# EAGLE board aduinobasic - копия (EAGLE 6.3)
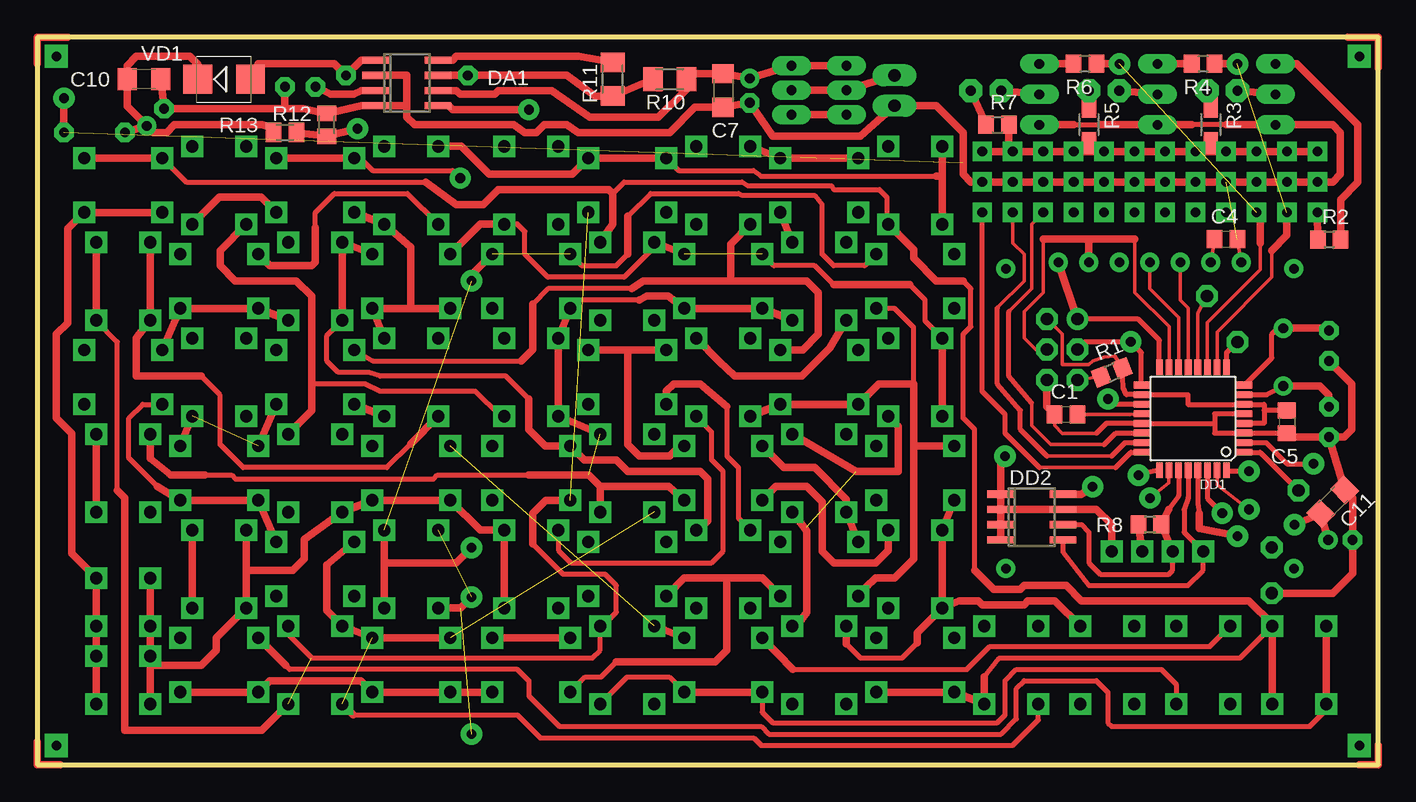
[diagram p0: board, top side]
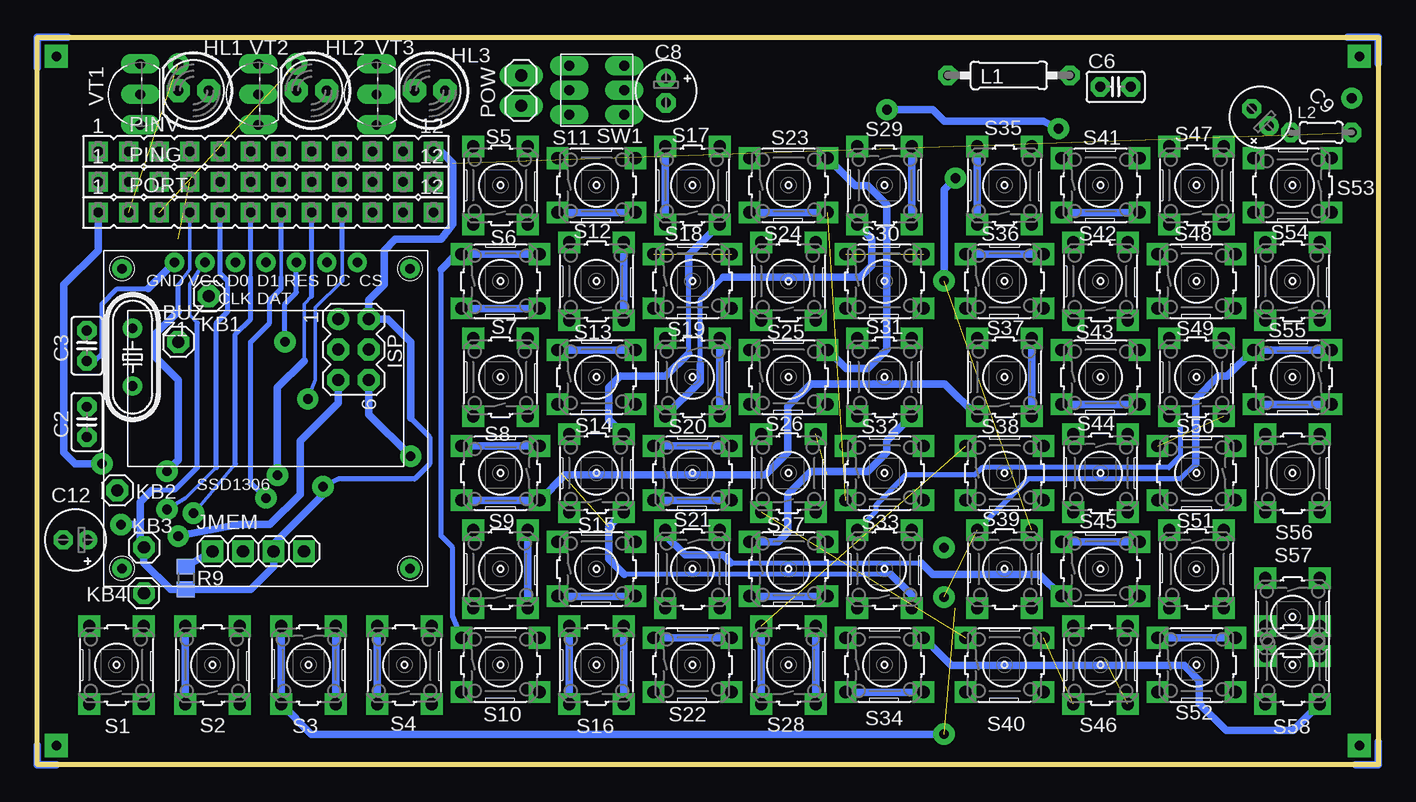
[diagram p1: board, bottom side, seen from below]

Size 111.76 x 60.64 mm. Coordinates in mm from the lower left corner, seen from the top.
Outline: 111.76,60.64 0,60.64 0,0 111.76,0 111.76,60.64
Copper layers (1*16): Top 0.035mm / dielectric 1.5mm / Bottom 0.035mm
Design rules "ArduinoBASIC": minimum track width 10mil, minimum drill 24mil, track to track 8mil, track to pad 8mil, pad to pad 8mil, via to via 8mil, smd to smd 8mil, copper to edge 40mil, drill to drill 7mil, minimum pad ring 0.4mm, minimum via ring 8mil, stop-mask expansion 4mil, vias tented up to drill 0mil, thermal gap 10mil

## Footprints (pad centres in the part's own frame; a part is rotated, then mirrored left to right if it is on the bottom)
1X01 = drill 1.016 octagon: 1 0,0
C0805 = smd 1.3 x 1.5: 1 -0.95,0; 2 0.95,0
C025-025X050 = drill 0.813 octagon: 1 -1.27,0; 2 1.27,0
C1206 = smd 1.6 x 1.8: 1 -1.4,0; 2 1.4,0
RCL_E2-5 = drill 0.813 pad 1.27: + -1.016,0 | drill 0.813 pad 1.27 octagon: - 1.016,0
SOIC8 = smd 0.6 x 2.2: 1 -1.905,-2.6; 2 -0.635,-2.6; 3 0.635,-2.6; 4 1.905,-2.6; 5 1.905,2.6; 6 0.635,2.6; 7 -0.635,2.6; 8 -1.905,2.6
TQFP32-08 = smd 1.27 x 0.559: 1 -4.293,2.8; 2 -4.293,2; 3 -4.293,1.2; 4 -4.293,0.4; 5 -4.293,-0.4; 6 -4.293,-1.2; 7 -4.293,-2; 8 -4.293,-2.8; 17 4.293,-2.8; 18 4.293,-2; 19 4.293,-1.2; 20 4.293,-0.4; 21 4.293,0.4; 22 4.293,1.2; 23 4.293,2; 24 4.293,2.8 | smd 0.559 x 1.27: 9 -2.8,-4.293; 10 -2,-4.293; 11 -1.2,-4.293; 12 -0.4,-4.293; 13 0.4,-4.293; 14 1.2,-4.293; 15 2,-4.293; 16 2.8,-4.293; 25 2.8,4.293; 26 2,4.293; 27 1.2,4.293; 28 0.4,4.293; 29 -0.4,4.293; 30 -1.2,4.293; 31 -2,4.293; 32 -2.8,4.293
SO-08 = smd 0.6 x 2.2: 1 -1.905,-2.6; 2 -0.635,-2.6; 3 0.635,-2.6; 4 1.905,-2.6; 5 1.905,2.6; 6 0.635,2.6; 7 -0.635,2.6; 8 -1.905,2.6
SSD1306_0.96 = drill 0.8: CS 7.62,10.12; D1/DAT 0,10.12; DC 5.08,10.12; DO/CLK -2.54,10.12; GND -7.62,10.12; P$1 -12,9.6; P$2 12,9.6; P$3 12,-15.4; P$4 -12,-15.4; RES 2.54,10.12; VCC -5.08,10.12
LED5MM = drill 0.813 pad 1.93 octagon: A -1.27,0; K 1.27,0
MA03-2 = drill 1.016: 1 -2.54,-1.27 | drill 1.016 octagon: 2 -2.54,1.27; 3 0,-1.27; 4 0,1.27; 5 2.54,-1.27; 6 2.54,1.27
1X04 = drill 1.016 square: 1 -3.81,0; 2 -1.27,0; 3 1.27,0; 4 3.81,0
0207/10 = drill 0.813 octagon: 1 -5.08,0; 2 5.08,0
0204/5 = drill 0.813 octagon: 1 -2.54,0; 2 2.54,0
FE12 = drill 0.813 square: 1 -13.97,0; 2 -11.43,0; 3 -8.89,0; 4 -6.35,0; 5 -3.81,0; 6 -1.27,0; 7 1.27,0; 8 3.81,0; 9 6.35,0; 10 8.89,0; 11 11.43,0; 12 13.97,0
1X02 = drill 1.016 long: 1 -1.27,0; 2 1.27,0
R0805 = smd 1.3 x 1.5: 1 -0.95,0; 2 0.95,0
R1206W = smd 1.8 x 1.2: 1 -1.499,0; 2 1.499,0
M1206 = smd 1.6 x 2: 1 -1.4,0; 2 1.4,0
M0805 = smd 1.3 x 1.6: 1 -0.95,0; 2 0.95,0
B3F-10XX = drill 1.016 square: 1 -3.251,2.261; 2 3.251,2.261; 3 -3.251,-2.261; 4 3.251,-2.261
9077-2 = drill 0.813 long: 1 -2.04,2.29; 2 0,2.29; 3 2.04,2.29; 4 -2.04,-2.29; 5 0,-2.29; 6 2.04,-2.29
SMB = smd 2.4 x 2.4: A 2.2,0; C -2.2,0
TO92-ECB = drill 0.813 long: B 2.54,0; C 0,0; E -2.54,0
HC49/S = drill 0.813: 1 -2.413,0; 2 2.413,0

## Placement (x,y rotation side)
BUZ  [1X01]  100.01,35.24 0 bottom
C1  100n  [C0805]  85.72,29.21 0 top
C2  1n  [C025-025X050]  107.63,28.57 90 bottom
C3  1n  [C025-025X050]  107.63,34.93 90 bottom
C4  100n  [C0805]  99.06,43.82 0 top
C5  100n  [C0805]  104.14,28.57 270 top
C6  1n  [C025-025X050]  21.91,56.52 0 bottom
C7  100n  [C1206]  57.15,56.2 270 top
C8  47µ/16V  [RCL_E2-5]  59.37,56.2 270 bottom
C9  100µ 16V  [RCL_E2-5]  9.84,53.98 135 bottom
C10  100n  [C1206]  8.89,57.15 180 top
C11  100n  [C1206]  107.95,21.91 225 top
C12  100µ 16V  [RCL_E2-5]  108.58,18.73 180 bottom
DA1  MC34063AD  [SOIC8]  30.8,56.83 270 top
DD1  ATMEGA328  [TQFP32-08]  96.31,28.84 180 top
DD2  24LC256SN  [SO-08]  82.87,20.64 270 top
DISPLAY  SSD1306  [SSD1306_0.96]  92.71,31.75 0 bottom
HL1  [LED5MM]  98.74,56.2 180 bottom
HL2  [LED5MM]  88.9,56.2 180 bottom
HL3  [LED5MM]  79.06,56.2 180 bottom
ISP  [MA03-2]  85.41,34.61 270 bottom
JMEM  [1X04]  93.34,17.78 0 bottom
KB1  [1X01]  97.47,39.05 0 bottom
KB2  [1X01]  105.09,22.86 0 bottom
KB3  [1X01]  102.87,18.1 0 bottom
KB4  [1X01]  102.87,14.29 180 bottom
L1  100uh  [0207/10]  30.8,57.47 0 bottom
L2  [0204/5]  4.76,52.71 0 bottom
PING  [FE12]  92.71,48.58 0 bottom
PINV  [FE12]  92.71,51.12 0 bottom
PORT  [FE12]  92.71,46.04 0 bottom
POW  [1X02]  71.44,56.2 270 bottom
R1  10k  [R0805]  89.53,32.7 22 top
R2  1k  [R0805]  107.67,43.79 0 top
R3  10k  [R1206W]  97.79,53.34 270 top
R4  10k  [R0805]  97.16,58.42 180 top
R5  10k  [R1206W]  87.63,53.34 270 top
R6  10k  [R0805]  87.31,58.42 180 top
R7  10k  [R0805]  80.01,53.34 0 top
R8  10k  [R0805]  92.71,20 180 top
R9  10k  [R0805]  99.38,15.56 270 bottom
R10  1  [M1206]  52.7,57.15 180 top
R11  200  [M1206]  47.94,57.15 270 top
R12  1k  [M0805]  24.13,53.34 270 top
R13  3k  [M0805]  20.64,52.71 180 top
S1  LSH  [B3F-10XX]  105.16,8.3 90 bottom
S2  Space  [B3F-10XX]  97.16,8.3 90 bottom
S3  ~  [B3F-10XX]  89.16,8.3 270 bottom
S4  [  [B3F-10XX]  81.16,8.3 90 bottom
S5  Y  [B3F-10XX]  73.16,48.3 90 bottom
S6  K  [B3F-10XX]  73.16,40.3 0 bottom
S7  V  [B3F-10XX]  73.16,32.3 90 bottom
S8  A  [B3F-10XX]  73.16,24.3 180 bottom
S9  Q  [B3F-10XX]  73.16,16.3 90 bottom
S10  ]  [B3F-10XX]  73.16,8.3 0 bottom
S11  W  [B3F-10XX]  65.16,48.3 0 bottom
S12  E  [B3F-10XX]  65.16,40.3 90 bottom
S13  S  [B3F-10XX]  65.16,32.3 0 bottom
S14  M  [B3F-10XX]  65.16,24.3 90 bottom
S15  J  [B3F-10XX]  65.16,16.3 0 bottom
S16  Z  [B3F-10XX]  65.16,8.3 90 bottom
S17  X  [B3F-10XX]  57.16,48.3 90 bottom
S18  R  [B3F-10XX]  57.16,40.3 0 bottom
S19  D  [B3F-10XX]  57.16,32.3 270 bottom
S20  U  [B3F-10XX]  57.16,24.3 0 bottom
S21  B  [B3F-10XX]  57.16,16.3 270 bottom
S22  Space  [B3F-10XX]  57.16,8.3 0 bottom
S23  H  [B3F-10XX]  49.16,48.3 0 bottom
S24  T  [B3F-10XX]  49.16,40.3 90 bottom
S25  N  [B3F-10XX]  49.16,32.3 0 bottom
S26  P  [B3F-10XX]  49.16,24.3 90 bottom
S27  L  [B3F-10XX]  49.16,16.3 0 bottom
S28  Space  [B3F-10XX]  49.16,8.3 90 bottom
S29  F  [B3F-10XX]  41.16,48.3 270 bottom
S30  Ii  [B3F-10XX]  41.16,40.3 0 bottom
S31  O  [B3F-10XX]  41.16,32.3 270 bottom
S32  G  [B3F-10XX]  41.16,24.3 0 bottom
S33  C  [B3F-10XX]  41.16,16.3 90 bottom
S34  \|  [B3F-10XX]  41.16,8.3 0 bottom
S35  7  [B3F-10XX]  31.16,48.3 90 bottom
S36  4  [B3F-10XX]  31.16,40.3 0 bottom
S37  1  [B3F-10XX]  31.16,32.3 90 bottom
S38  ,<  [B3F-10XX]  31.16,24.3 0 bottom
S39  =+  [B3F-10XX]  31.16,16.3 270 bottom
S40  ;:  [B3F-10XX]  31.16,8.3 0 bottom
S41  8  [B3F-10XX]  23.16,48.3 0 bottom
S42  5  [B3F-10XX]  23.16,40.3 90 bottom
S43  2  [B3F-10XX]  23.16,32.3 0 bottom
S44  .>  [B3F-10XX]  23.16,24.3 270 bottom
S45  /?  [B3F-10XX]  23.16,16.3 0 bottom
S46  " '  [B3F-10XX]  23.16,8.3 90 bottom
S47  9  [B3F-10XX]  15.16,48.3 90 bottom
S48  6  [B3F-10XX]  15.16,40.3 0 bottom
S49  3  [B3F-10XX]  15.16,32.3 90 bottom
S50  0  [B3F-10XX]  15.16,24.3 180 bottom
S51  *  [B3F-10XX]  15.16,16.3 270 bottom
S52  RSH  [B3F-10XX]  15.16,8.3 0 bottom
S53  Backspace  [B3F-10XX]  7.16,48.3 180 bottom
S54  Esc  [B3F-10XX]  7.16,40.3 90 bottom
S55  -_  [B3F-10XX]  7.16,32.3 180 bottom
S56  +  [B3F-10XX]  7.16,24.3 270 bottom
S57  Enter  [B3F-10XX]  7.16,12.3 270 bottom
S58  Enter  [B3F-10XX]  7.16,8.3 270 bottom
SW1  POW  [9077-2]  65.14,56.23 270 bottom
VD1  SS12  [SMB]  15.56,57.15 0 top
VT1  КТ315Б  [TO92-ECB]  103.19,55.88 90 bottom
VT2  КТ315Б  [TO92-ECB]  93.34,55.88 90 bottom
VT3  КТ315Б  [TO92-ECB]  83.5,55.88 90 bottom
Z1  16Mhz  [HC49/S]  103.82,33.97 270 bottom

## Library data of the parts
BUZ KB1-KB4 POW = pinhead
C1-C6 C10 C11 L1 L2 R1-R13 = rcl
C7 = rc-elektronik
C8 C9 C12 = HWProgUSB
DA1 = mc34063
DD1 = atmel; MPN: ATMEGA8-16AU; OC_FARNELL: 9171371; OC_NEWARK: 73M8863
DD2 = microchip; MF: MICROCHIP; MPN: 24LC256-I/SN; OC_FARNELL: 9757996; OC_NEWARK: 27C9144
DISPLAY HL1-HL3 JMEM SW1 = ArduinoBASIC
ISP = con-lstb
PING PINV PORT = ArduinoBASIC; OC_FARNELL: unknown; OC_NEWARK: unknown
S1-S58 = ArduinoBASIC; MPN: B3F-1000; OC_FARNELL: 176432; OC_NEWARK: 36M3542
VD1 = diode
VT1-VT3 = transistor
Z1 = crystal; OC_FARNELL: 1667008; OC_NEWARK: unknown

## Nets
A0: DD1.23 PORT.11
A1: DD1.24 PORT.12
A2: DD1.25 PORT.8
A3: DD1.26 PORT.7
A6: DD1.19 PORT.9
A7: DD1.22 PORT.10
AREF: C1.2 DD1.20
BUZ: BUZ.1 DD1.9
CLK: DD1.13 DISPLAY.DO/CLK
D0: DD1.30 PORT.6
D1: DD1.31 PORT.5
D2: DD1.32 PORT.4
D3: S34.1 S34.2 S53.1 S53.2 S57.1 S57.2 S58.1 S58.2
D4: DD1.2 PORT.1 R2.1
D6: DD1.10 PORT.2 R4.1
D7: DD1.11 PORT.3 R6.1
D12: S3.1 S3.2 S8.1 S8.2 S9.1 S9.2 S16.1 S16.2 S37.1 S54.1 S54.2
D13: S11.1 S11.2 S13.1 S13.2 S17.1 S17.2 S43.1
D14: S12.1 S19.1 S19.2 S33.2 S49.1
D15: S7.1 S7.2 S18.1 S18.2 S21.1 S24.2 S29.1 S29.2 S32.1 S36.1 S36.2 S42.1 S42.2
D16: S5.1 S5.2 S14.1 S15.1 S20.1 S20.2 S23.1 S23.2 S25.1 S25.2 S35.1 S35.2 S48.1
D17: S6.1 S6.2 S10.1 S30.1 S30.2 S39.1 S39.2 S41.1 S41.2
D18: S27.1 S31.2 S44.1 S47.1
D19: S4.1 S4.2 S26.1 S40.1 S40.2 S45.1 S45.2 S46.1 S46.2 S50.1 S50.2 S55.1 S55.2
D23: S2.1 S2.2 S22.1 S22.2 S28.1 S28.2 S38.1
D24: S51.1 S51.2
D25: S56.1 S56.2
D26: S1.1 S1.2 S52.1 S52.2
DATA: DD1.14 DISPLAY.D1/DAT
GND: C1.1 C2.1 C3.1 C4.2 C5.2 C6.2 C7.2 C8.- C9.- C10.1 C11.1 C12.- DA1.2 DA1.4 DD1.3 DD1.5 DD1.21 DD2.1 DD2.2 DD2.3 DD2.4 DD2.7 DISPLAY.GND ISP.6 JMEM.4 KB4.1 PING.1 PING.2 PING.3 PING.4 PING.5 PING.6 PING.7 PING.8 PING.9 PING.10 PING.11 PING.12 POW.2 R12.1 VT1.E VT2.E VT3.E
KBDAT: DD1.12 KB1.1
KBIRQ: DD1.1 KB2.1
MISO: DD1.16 DISPLAY.CS ISP.1
MOSI: DD1.15 DISPLAY.DC ISP.4
N$1: C2.2 DD1.7 Z1.2
N$2: C3.2 DD1.8 Z1.1
N$3: C7.1 C8.+ DA1.6 R10.1 SW1.1 SW1.4
N$4: POW.1 SW1.2 SW1.5
N$5: DA1.8 R11.1
N$6: DA1.7 L1.1 R10.2 R11.2
N$7: DA1.5 R12.2 R13.1
N$8: DA1.1 L1.2 VD1.A
N$9: C6.1 DA1.3
N$10: SW1.3 SW1.6
N$11: HL1.K VT1.C
N$12: R2.2 VT1.B
N$13: HL1.A R3.1
N$14: HL2.K VT2.C
N$15: R4.2 VT2.B
N$16: HL2.A R5.1
N$17: HL3.K VT3.C
N$18: R6.2 VT3.B
N$19: HL3.A R7.1
N$21: C9.+ C10.2 L2.1 R13.2 VD1.C
RESET: DD1.29 ISP.5 R1.1
SCK: DD1.17 DISPLAY.RES ISP.3
SCL: DD1.28 DD2.5 JMEM.1 R9.1
SDA: DD1.27 DD2.6 JMEM.2 R8.1
U4: S35.3 S36.3 S36.4 S37.3 S37.4 S41.3 S41.4 S43.3 S43.4 S47.3 S49.3 S50.3 S50.4
U5: S3.3 S3.4 S39.3 S39.4 S42.3 S48.3 S48.4 S55.3 S55.4
U6: S21.3 S25.3 S45.3
U7: S7.3 S14.3 S14.4 S16.3 S16.4 S17.3 S33.3 S33.4 S38.3 S38.4 S44.4 S51.3 S51.4 S57.3 S57.4 S58.3 S58.4
U8: S2.3 S22.3 S22.4 S23.3 S23.4 S28.3 S28.4 S32.3 S46.3 S46.4 S54.3 S54.4
U9: S6.3 S6.4 S8.3 S8.4 S13.3 S13.4 S15.3 S15.4 S19.4 S27.3 S27.4 S29.4 S34.3 S34.4 S40.3 S40.4 S52.3 S52.4
U10: S1.3 S1.4 S4.3 S5.3 S10.3 S10.4 S24.4 S53.3 S53.4
U11: S9.3 S9.4 S11.3 S11.4 S12.3 S12.4 S18.3 S18.4 S20.3 S20.4 S26.3 S26.4 S30.3 S31.3 S31.4 S56.3
VCC: C4.1 C5.1 C11.2 C12.+ DD1.4 DD1.6 DD1.18 DD2.8 DISPLAY.VCC ISP.2 JMEM.3 KB3.1 L2.2 PINV.1 PINV.2 PINV.3 PINV.4 PINV.5 PINV.6 PINV.7 PINV.8 PINV.9 PINV.10 PINV.11 PINV.12 R1.2 R3.2 R5.2 R7.2 R8.2 R9.2

## Tracks (layer width: path | path; a pad name or v marks a point on that pad's centre or on a via)
A0
  Top 0.305: 80.01,38.1 82.23,40.32 82.23,42.55 81.28,43.5 PORT.11 | 84.14,25.72 89.53,25.72
  Top 0.406: 89.53,25.72 90.66,26.84 DD1.23 | 84.14,25.72 81.91,27.94 81.91,29.53 80.01,31.75 80.01,38.1
A1
  Top 0.305: 83.5,24.76 89.85,24.76 | 91.69,26.04 DD1.24
  Top 0.406: 89.85,24.76 91.12,26.04 91.69,26.04 | 83.5,24.76 80.64,27.62 80.64,29.21 78.74,31.11 PORT.12
A2  (via drill 0.8 pad 1.78)
  Top 0.406: DD1.25 v91.76,24.13
  Bottom 0.305: 89.53,33.66 89.53,38.42 88.9,39.05 | 88.9,40.64 88.9,42.86
  Bottom 0.406: 88.9,39.05 88.9,40.64 | 88.9,42.86 PORT.8
  Bottom 0.61: v91.76,24.13 91.76,31.43 89.53,33.66
A3  (via drill 0.8 pad 1.78)
  Top 0.305: DD1.26 94.3,23.9 94.3,23.49 v92.71,22.22
  Bottom 0.305: 91.44,40.64 91.44,42.86
  Bottom 0.406: v92.71,22.22 93.98,23.49 93.98,35.24 92.39,36.83 92.39,38.73 91.44,39.69 91.44,40.64 | 91.44,42.86 PORT.7
A6  (via drill 0.8 pad 1.78)
  Top 0.406: DD1.19 89.97,30.04 v89.22,30.48
  Bottom 0.305: v89.22,30.48 88.58,32.07 88.58,38.1 86.36,40.32 | 86.36,40.64 86.36,42.86
  Bottom 0.406: 86.36,40.32 86.36,40.64 | 86.36,42.86 PORT.9
A7
  Top 0.305: 80.96,37.78 82.87,39.69 82.87,45.09 PORT.10 | 88.9,26.67 84.45,26.67 82.87,28.26 82.87,30.16
  Top 0.406: 88.9,26.67 89.87,27.64 DD1.22 | 82.87,30.16 80.96,32.39 80.96,37.78
AREF
  Top 0.305: DD1.20 91.06,29.21 C1.2
BUZ
  Top 0.406: DD1.9 99.11,34.34 BUZ.1
CLK
  Top 0.305: DD1.13 95.91,38.08 95.25,38.73 DISPLAY.DO/CLK
D0  (via drill 0.8 pad 1.78)
  Top 0.406: DD1.30 97.51,22.19 v98.74,20.95
  Bottom 0.305: v98.74,20.95 95.25,25.08 | 93.98,40.64 93.98,42.86
  Bottom 0.406: 95.25,25.08 95.25,35.88 93.98,37.15 93.98,40.64 | 93.98,42.86 PORT.6
D1  (via drill 0.8 pad 1.78)
  Top 0.305: DD1.31 98.31,23.29 v100.96,21.27
  Bottom 0.305: v100.96,21.27 99.38,22.22 96.84,24.76
  Bottom 0.406: 96.84,24.76 96.84,36.83 95.88,37.78 95.88,40.32 96.52,40.96 PORT.5
D2  (via drill 0.8 pad 1.78)
  Top 0.406: v100.96,24.45 99.21,24.45 DD1.32
  Bottom 0.305: 100.01,40.01 99.06,41.27 PORT.4
  Bottom 0.406: 100.01,37.78 100.01,40.01
  Bottom 0.61: v100.96,24.45 100.01,25.4 100.01,32.07 101.92,33.97 101.92,35.88 100.01,37.78
D3
  Top 0.61: S58.1 S57.1 | S57.1 S58.2 S57.2 | S53.1 | S34.1 S34.2 | S53.2 S53.1 | S53.1 2.54,44.67 2.54,36.83 1.59,35.88 1.59,28.89 2.86,27.62 2.86,17.59 S57.1
  Bottom 0.61: S34.2 35.6,8.26 16.19,8.26 14.92,6.99 14.92,5.08 12.7,2.86 7.09,2.86 S58.2
D4  (via drill 0.8 pad 1.78)
  Top 0.406: DD1.2 102.38,26.84 104.14,25.08 v106.36,25.08
  Top 0.61: PORT.1 R2.1
  Bottom 0.61: PORT.1 106.68,42.86 109.54,40.01 109.54,26.04 108.58,25.08 v106.36,25.08
D6  (via drill 0.8 pad 1.78)  (1 unrouted)
  Top 0.305: DD1.10 98.31,36.08 102.87,40.64 102.87,42.86
  Top 0.61: 102.87,42.86 104.14,44.13 PORT.2 | R4.1 v100.01,58.42
D7  (via drill 0.8 pad 1.78)  (1 unrouted)
  Top 0.305: DD1.11 97.51,36.87 101.92,41.27 101.92,43.5
  Top 0.61: 101.92,43.5 101.92,45.72 PORT.3 | R6.1 v90.17,58.42
D12
  Top 0.406: 31.11,26.74 29.14,24.76 17.14,24.76 15.24,26.67 15.24,30.8 13.65,32.39 | 67.42,10.05 68.58,8.89 72.07,8.89 73.34,10.16
  Top 0.61: S9.2 S9.1 | S54.2 S54.1 8.25,35.57 8.25,32.39 13.65,32.39 | 31.11,26.74 S37.1 | S9.2 75.38,19.55 | S8.2 S9.2 | S9.1 76.83,13.65 78.42,13.65 78.74,13.34 82.23,13.34 82.55,13.65 84.8,13.65 S3.1 | S16.2 67.42,10.05 | 73.34,10.16 73.34,10.97 S9.1
  Bottom 0.61: S3.2 S3.1 | S8.2 S8.1 67.82,24.13 51.12,24.13 49.21,26.04 49.21,29.84 47.31,31.75 36.12,31.75 S37.1 | S16.1 S16.2
D13
  Top 0.406: 49.53,39.69 42.55,39.69 41.28,38.42 | S43.1 27.94,33.66 40.32,33.66
  Top 0.61: S17.2 S11.2 S11.1 | S13.2 63.77,34.56 65.09,35.88 65.09,39.37 64.13,40.32 57.78,40.32 | S17.1 57.78,43.41 57.78,40.32 | 57.78,40.32 50.48,40.32 49.53,39.69 | 40.32,33.66 41.28,34.61 41.28,38.42
  Bottom 0.61: S17.1 S17.2 | S13.1 S13.2
D14
  Top 0.406: S33.2 43.42,17.86 44.45,16.83 56.2,16.83 57.15,17.78 57.15,24.45 56.2,25.4 56.2,27.75 S19.2
  Top 0.61: S12.1 66.04,34.72 63.71,32.39 58.1,32.39 56.83,33.62 S19.1
  Bottom 0.406: S49.1 16.51,28.14 16.51,25.72 17.46,24.76 33.02,24.76 33.66,24.13 39.37,24.13 41.91,21.59 41.91,21.06 S33.2
  Bottom 0.61: S19.2 S19.1
D15  (1 unrouted)
  Top 0.406: S7.2 73.98,36.99 73.98,38.73 72.71,40.01 | 66.36,40.01 64.77,41.59 61.38,41.59 S18.1 | S24.2 51.42,43.17 48.89,40.64 42.55,40.64 40.64,42.55 40.64,44.45 40,45.09 39.97,45.05 S29.2 | 40.96,30.48 39.05,32.39 28.57,32.39 27.62,32.7 25.08,32.7 24.13,33.66 24.13,35.76 S42.1
  Top 0.61: S42.1 S42.2 S36.2 | S36.1 36.9,45.05 S29.2 | S24.2 S18.2 | S7.1 S7.2 | S21.1 55.11,19.55 55.88,20.32 55.88,23.81 55.24,24.45 49.21,24.45 48.26,25.4 45.57,25.4 S32.1 42.34,26.56 40.96,27.94 40.96,30.48 | 72.71,40.01 66.36,40.01
  Bottom 0.61: S36.1 S36.2 | S29.1 S29.2
D16
  Top 0.406: 23.18,44.77 23.18,46.04 24.76,47.62 30.84,47.62 S35.1 | S23.1 53.44,49.53 59.69,49.53 60.33,49.05 74.93,49.05
  Top 0.61: S15.1 S14.1 67.42,22.11 64.77,24.76 62.21,24.76 S20.1 | S23.1 S23.2 44.56,49.21 37.66,49.21 35.33,51.55 S35.2 | S48.1 19.38,41.59 22.86,41.59 23.18,41.91 23.18,44.77 | S20.2 53.55,26.56 52.7,25.72 50.16,25.72 49.21,26.67 49.21,34.56 | S5.2 75.42,49.05 | 75.42,49.05 S5.1 | 74.93,49.05 75.42,49.05 | S25.2 49.21,34.56 | 49.21,34.56 S25.1
  Bottom 0.61: S35.1 S35.2 | S20.1 S20.2 | S25.2 44.37,33.02 42.55,33.02 40.96,34.61 40.96,46.67 42.55,48.26 43.61,48.26 S23.2
D17  (via drill 0.8 pad 1.78)  (2 unrouted)
  Top 0.406: S41.1 26.91,50.56 27.94,49.53 34.61,49.53 v35.24,48.9 | 49.21,45.72 51.12,47.62 58.42,47.62 58.74,47.47 64.77,47.47 65.41,46.67 65.41,42.55 66.36,41.59 68.94,41.59 S6.2 | S30.1 45.38,41.59 48.26,41.59 49.21,42.55
  Top 0.61: S41.2 S41.1 | S39.2 28.9,16.83 | 28.9,16.83 S39.1 | v36.19,40.32 36.19,40.85 S30.2 | 49.21,42.55 49.21,45.72 | v36.19,18.1 34.92,16.83 28.9,16.83
  Bottom 0.406: S10.1 77.15,12.38 77.15,18.1 78.1,19.05 78.1,41.27 | 76.43,42.55 S6.1
  Bottom 0.61: S6.1 S6.2 | v35.24,48.9 36.19,47.94 v36.19,40.32 | 76.43,42.55 76.83,42.55 78.1,41.27
D18
  Top 0.406: S31.2 38.58,29.05 36.51,31.11 28.57,31.11 27.3,31.75 22.86,31.75
  Top 0.61: S44.1 22.86,29.51 22.86,31.75 22.86,39.05 21.59,40.32 16.51,40.32 15.24,41.59 15.24,42.87 S47.1
  Bottom 0.61: S27.1 50.02,18.56 49.21,19.37 49.21,22.54 47.31,24.45 42.55,24.45 40.96,26.04 40.96,26.99 S31.2
D19  (2 unrouted)
  Top 0.406: 26.32,4.13 40,4.13 41.91,2.22 59.69,2.22 60.33,1.59 81.28,1.59 83.42,3.73 S4.1 | 10,23.18 7.62,25.56 7.62,28.89 8.77,30.04 S55.2
  Top 0.61: 10,23.18 S50.1 S50.2 S45.2 | S45.1 24.13,16.66 24.13,12.84 S46.2 S40.2 S40.1 | 26.32,4.13 25.42,5.03 S46.1
  Bottom 0.61: S55.2 S55.1 | S45.1 S45.2 | S4.2 S4.1
D23  (1 unrouted)
  Top 0.406: S2.2 97.71,9.84 79.38,9.84 77.47,7.94 62.95,7.94
  Top 0.61: S22.2 S28.2 | S22.1 62.95,7.94
  Bottom 0.61: S22.2 S22.1 | S28.1 S28.2 | S2.2 S2.1
D24
  Top 0.61: S51.2 S51.1
D25
  Top 0.61: S56.2 S56.1
D26
  Top 0.406: S1.1 107.42,4.55 106.05,3.17 89.53,3.17 89.22,3.49 89.22,6.03 88.27,6.99 82.23,6.99 81.6,6.35 81.6,3.81 80.33,2.54 60.96,2.54 60.33,3.17 43.5,3.17 40.96,5.71 40.96,6.99 40,7.94 21.03,7.94 20.72,8.26
  Top 0.61: S1.2 S1.1 | S52.1 20.72,8.26
  Bottom 0.61: S52.2 S52.1
DATA
  Top 0.305: DD1.14 95.11,37.29 92.71,39.69 DISPLAY.D1/DAT
GND  (via drill 0.8 pad 1.78)  (1 unrouted)
  Top 0.305: 88.27,27.62 85.41,27.62 84.77,28.25 C1.1 | DISPLAY.GND C4.2
  Top 0.406: DD1.5 98.11,29.24 98.11,28.44 | 98.11,28.44 98.11,27.64 DD1.3 104.12,27.64 C5.2 | 98.11,28.44 DD1.21 89.08,28.44 88.27,27.62 | 86.36,53.34 88.58,53.34 | 99.06,53.34 96.2,53.34
  Top 0.61: C2.1 108.9,27.3 109.54,27.94 109.54,31.75 C3.1 | C2.1 104.46,27.3 C5.2 | 30.8,54.93 DA1.4 26.99,54.93 R12.1 22.14,54.69 20.64,54.69 | 30.8,54.93 30.8,57.47 DA1.2 | C10.1 C9.- 20.64,54.69 | 20.64,54.69 C6.2 | VT3.E 86.36,53.34 | 88.58,53.34 VT2.E 96.2,53.34 | 99.06,53.34 VT1.E 107.95,53.34 108.58,52.71 108.58,49.21 107.95,48.58 PING.1 PING.2 PING.3 PING.4 PING.5 PING.6 PING.7 PING.8 PING.9 PING.10 PING.11 PING.12 77.79,48.58 77.15,49.21 77.15,52.71 74.93,54.93 POW.2 68.58,52.39 61.28,52.39 C8.- C7.2 54.8,54.8 52.7,52.71 45.08,52.71 44.13,53.34 42.23,53.34 41.59,52.71 40.64,52.71 39.69,53.34 31.43,53.34 30.8,53.98 30.8,54.93 | ISP.6 84.14,29.85 C1.1 | C2.1 C11.1 109.6,22.24 C12.- 109.6,15.94 107.95,14.29 KB4.1 | v80.64,25.72 80.27,25.34 DD2.1 DD2.2 | DD2.2 DD2.3 DD2.4 | DD2.2 DD2.7 88.27,21.27 89.53,20 JMEM.4
  Bottom 0.406: C3.1 107,33.66 106.36,34.29 106.36,38.42 105.09,39.69 102.51,39.69
  Bottom 0.61: 102.51,39.69 DISPLAY.GND | v80.64,25.72 84.14,29.21 ISP.6
KBDAT
  Top 0.305: KB1.1 96.71,37.65 DD1.12
KBIRQ
  Top 0.406: DD1.1 101.91,26.04 KB2.1
MISO
  Top 0.406: DD1.16 93.51,35.4 91.76,37.15 ISP.1
  Top 0.61: ISP.1 DISPLAY.CS
MOSI
  Top 0.305: 83.82,43.82 83.82,39.37 82.23,37.78 82.23,35.56 83.19,34.61 ISP.4 | 91.44,43.82 91.44,39.37 94.31,36.5 DD1.15
  Top 0.61: 91.44,43.82 87.63,43.82 | 87.63,43.82 DISPLAY.DC | 87.63,43.82 83.82,43.82
N$1
  Top 0.406: DD1.7 102.47,30.84 Z1.2
  Top 0.61: Z1.2 106.87,31.56 107.63,30.8 C2.2
N$2
  Top 0.406: DD1.8 102.87,33.91 102.87,35.88 103.38,36.39 Z1.1
  Top 0.61: Z1.1 107.44,36.39 C3.2
N$3
  Top 0.61: SW1.4 SW1.1 C8.+ C7.1 54.87,57.6 R10.1 54.1,56.33 51.75,53.98 46.04,53.98 42.86,56.2 38.42,56.2 38.1,55.88 35.24,55.88 34.92,56.2 DA1.6
N$4
  Top 0.61: SW1.2 SW1.5 POW.1
N$5
  Top 0.61: DA1.8 34.61,58.74 34.92,59.05 45.08,59.05 R11.1
N$6
  Top 0.61: DA1.7 L1.1 44.13,57.47 46.48,55.75 R11.2 R10.2
N$7  (via drill 0.8 pad 1.78)
  Top 0.61: v40.96,54.61 34.61,54.61 34.29,54.93 DA1.5 | R13.1 R12.2 v26.67,53.02
  Bottom 0.61: v40.96,54.61 37.15,54.61 36.19,53.66 27.94,53.66 v26.67,53.02
N$8
  Top 0.61: DA1.1 26.99,58.74 L1.2 24.76,58.42 18.39,58.42 VD1.A
N$9
  Top 0.61: C6.1 24.45,55.88 26.35,55.88 26.99,56.2 DA1.3
N$10
  Top 0.61: SW1.6 SW1.3
N$11
  Top 0.61: VT1.C HL1.K
N$12
  Top 0.61: R2.2 108.61,47.12 110.04,48.55 110.04,53.34 104.94,58.44 103.21,58.44 VT1.B
N$13
  Top 0.61: R3.1 HL1.A
N$14
  Top 0.61: VT2.C HL2.K
N$15
  Top 0.61: R4.2 VT2.B
N$16
  Top 0.61: HL2.A R5.1
N$17
  Top 0.61: VT3.C HL3.K
N$18
  Top 0.61: R6.2 VT3.B
N$19
  Top 0.61: R7.1 HL3.A
N$20
  Bottom 0.61: 111.76,58.1 111.76,60.64 109.22,60.64
N$21
  Top 0.61: R13.2 19.69,53.02 18.73,53.34 11.43,53.34 10.79,52.71 9.68,52.71 C9.+ | VD1.C 13.36,58.4 12.7,59.05 8.25,59.05 7.49,58.29 C10.2 7.49,54.89 C9.+ | L2.1 C9.+
N$22
  Bottom 0.61: 111.76,1.59 111.76,0 110.17,0
N$23
  Bottom 0.61: 0,1.91 0,0 1.91,0
N$24
  Bottom 0.61: 2.54,60.64 0,60.64 0,58.42
N$25
  Top 0.61: 2.54,60.64 0,60.64 0,58.42
N$26
  Top 0.61: 111.76,58.1 111.76,60.64 109.22,60.64
N$27
  Top 0.61: 111.76,1.59 111.76,0 110.17,0
N$28
  Top 0.61: 1.91,0 0,0 0,1.91
N$29  (via drill 0.8 pad 1.93)
  other vias: 110.17,1.59
N$31  (via drill 0.8 pad 1.93)
  other vias: 1.59,1.59
N$33  (via drill 0.8 pad 1.93)
  other vias: 110.17,59.05
N$34  (via drill 0.8 pad 1.93)
  other vias: 1.59,59.05
RESET  (via drill 0.8 pad 1.78)
  Top 0.305: ISP.5 R1.1
  Top 0.406: DD1.29 96.71,21.78 96.84,20.95
  Top 0.61: 96.84,20.95 96.84,19.68 v100.01,19.05
  Bottom 0.61: v100.01,19.05 94.93,20 92.39,20 89.85,22.54 89.85,26.99 86.68,30.16 ISP.5
SCK  (via drill 0.8 pad 1.78)
  Top 0.406: ISP.3 87.31,35.24 v91.12,35.24 92.02,34.35 DD1.17
  Bottom 0.406: v91.12,35.24 91.12,38.42 90.17,39.37 DISPLAY.RES
SCL
  Top 0.406: DD1.28 95.91,22.25 95.57,21.27 95.57,19.37 JMEM.1 97.16,16.19 95.88,14.92 87.63,14.92 85.47,17.72 DD2.5
  Bottom 0.61: R9.1 JMEM.1
SDA
  Top 0.406: DD1.27 95.11,22.4 94.3,21.27 | DD2.6 86.99,20 87.63,19.37 87.63,16.83 88.58,15.88 94.3,15.88 94.61,16.19 JMEM.2
  Top 0.61: JMEM.2 R8.1 94.3,21.27
U4  (1 unrouted)
  Top 0.61: S50.4 S43.4 | S36.3 31.11,38.04 | 31.11,38.04 S36.4 S37.4 | S41.3 S35.3 31.11,43.15 31.11,38.04 | S43.3 S37.3 | S49.3 S50.3 | S47.3 15.16,47.31 18.64,47.31 S41.4
  Bottom 0.61: S37.3 S37.4 | S43.3 S43.4 | S41.3 S41.4
U5  (via drill 0.8 pad 1.78)  (2 unrouted)
  Top 0.61: S42.3 S48.3 S48.4 S55.4 | S39.4 35.27,13.05 v36.19,13.97
  Bottom 0.406: 15.24,25.08 16.51,23.81 29.21,23.81 29.21,23.76 S39.3
  Bottom 0.61: S55.3 S55.4 12.59,32.39 13.34,32.39 15.24,30.48 15.24,25.08 | v36.19,2.54 88.91,2.54 S3.4 S3.3
U6
  Top 0.406: 57.47,29.84 57.47,25.72 58.42,24.76 58.42,20.55 S21.3
  Top 0.61: 57.47,29.84 55.24,31.75 53.02,31.75 52.41,31.14 S25.3
  Bottom 0.406: 53.97,16.83 38.1,16.83
  Bottom 0.61: S21.3 59.42,19.1 57.78,17.46 54.61,17.46 53.97,16.83 | 38.1,16.83 37.15,15.88 28.25,15.88 S45.3
U7  (1 unrouted)
  Top 0.61: S58.4 9.42,8.26 | 9.42,8.26 S57.4 S58.3 S57.3 9.42,15.88 | S51.3 17.42,16.19 | 17.42,16.19 S51.4 14.92,10.55 14.92,9.53 13.65,8.26 9.42,8.26 | S7.3 71.75,28.19 71.75,24.45 68.23,24.45 S14.4 | S33.3 S33.4 36.9,19.55 S38.3 S38.4 S44.4 22.22,18.77 22.22,17.14 21.27,16.19 17.42,16.19 | S14.3 64.13,19.5 64.13,12.7 63.3,11.55 S16.4
  Bottom 0.406: 40.64,15.88 62.86,15.88 | 57.47,34.29 57.47,40.58
  Bottom 0.61: S16.3 S16.4 | S14.3 64.13,19.81 64.13,17.14 62.86,15.88 | 40.64,15.88 38.9,14.13 S33.3 | S14.4 64.13,28.79 64.13,31.43 63.18,32.39 59.37,32.39 57.47,34.29 | 57.47,40.58 57.47,42.48 S17.3
U8  (2 unrouted)
  Top 0.406: S46.4 20.9,10.85 22.86,8.89 46.26,8.89 46.9,9.53 S28.4 47.11,11.55 48.26,12.7 48.26,14.92 47.31,15.88 43.81,15.88 41.28,18.41 | S22.3 60.41,4.36 61.28,3.49 80.01,3.49 80.64,4.13 80.64,6.99 81.6,7.94 93.66,7.94 94.9,6.7 S2.3 | S28.3 49.15,7.3 52.65,7.3 S22.4 | 6.67,22.86 6.67,35.24 4.9,37.01 S54.3
  Top 0.61: S22.3 S22.4 | S54.4 S54.3 | S46.3 18.71,2.86 7.3,2.86 7.3,22.22 6.67,22.86 | S32.3 42.36,22.04 41.28,20.95 41.28,18.41
  Bottom 0.61: S28.3 S28.4 | S23.3 S23.4
U9
  Top 0.406: 48.26,8.57 46.99,7.3 45.67,7.3 S34.3 | 73.02,31.75 73.02,36.45 71.44,38.04 S6.4
  Top 0.61: S34.4 S40.3 S40.4 26.96,6.99 19.36,6.99 S52.3 S52.4 | S15.3 69.05,14.75 69.85,15.56 71.44,15.56 73.02,17.14 73.02,26.56 | 73.02,26.56 73.02,31.75 70.12,31.75 S13.3 S13.4 S19.4 | S27.3 53.93,15.56 57.47,15.56 | 57.47,15.56 60.39,15.56 S15.4 | S8.4 73.02,26.56 | 48.26,8.57 56.52,8.57 57.47,9.53 57.47,15.56
  Bottom 0.406: 56.52,33.34 56.52,38.73 54.61,40.64
  Bottom 0.61: S34.3 S34.4 | S6.4 S6.3 | S15.3 S15.4 | S27.4 S27.3 | S8.3 S8.4 | 54.61,40.64 43.18,40.64 42.23,41.59 42.23,43.86 S29.4 | S19.4 56.52,31.95 56.52,33.34
U10
  Top 0.406: S53.4 12.39,48.58 32.39,48.58 | 47.94,47.62 48.89,48.58 58.74,48.58 59.21,48.26 66.2,48.26 66.36,47.94 70.17,47.94 70.8,47.31 70.8,45.15 S5.3 | 78.9,7.3 80.17,8.89 100.24,8.89 S1.4 | 78.1,16.19 78.1,27.94 77.15,28.89 77.15,35.88 77.79,36.51 77.79,39.69 77.15,40.32
  Top 0.61: S24.4 47.94,45.09 47.94,47.62 47.62,47.94 38.42,47.94 37.15,46.67 34.92,46.67 32.39,48.58 | S10.4 S10.3 S4.3 78.9,7.3 | S53.3 S53.4 | S5.3 73.02,42.92 73.02,42.23 74.93,40.32 77.15,40.32 | 78.1,16.19 79.69,14.61 81.91,14.61 82.23,14.92 85.72,14.92 86.99,13.65 100.96,13.65 102.9,11.72 S1.4 S1.3
U11  (1 unrouted)
  Top 0.406: 13.97,24.13 16.19,24.13 16.51,23.81 33.02,23.81 33.34,24.13 40.96,24.13 | 50.16,38.73 45.11,38.73 S30.3
  Top 0.61: 46.9,23.18 45.95,24.13 40.96,24.13 | 46.9,23.18 S26.3 | S56.3 9.42,25.5 11.11,24.13 13.97,24.13 | S20.4 52.64,23.18 46.9,23.18 | S12.3 S18.3 S18.4 52.58,39.05 50.8,39.05 50.16,38.73 | S9.4 70.9,17.88 69.85,16.83 66.36,16.83 65.41,17.78 65.41,21.91 64.13,23.18 61.55,23.18 S20.3 | S11.4 S12.4 | S30.3 S31.3 S31.4 S26.4
  Bottom 0.61: S20.3 S20.4 | S9.4 S9.3 | S12.4 S12.3 | S11.3 S11.4
VCC  (via drill 0.8 pad 1.78)  (1 unrouted)
  Top 0.305: ISP.2 85.41,35.88 85.41,33.34 87.63,33.34 87.95,33.66 88.9,33.97 89.78,34.04 R1.2 | C4.1 DISPLAY.VCC
  Top 0.406: C5.1 102.23,29.52 | 102.23,29.52 102.23,28.44 DD1.4 | 102.23,29.52 102.23,30.04 DD1.6 95.88,30.04 95.88,30.84 DD1.18 90.76,30.84 90.49,31.43 R1.2
  Top 0.61: PINV.1 PINV.2 PINV.3 PINV.4 | PINV.4 97.47,51.12 | 97.47,51.12 PINV.5 PINV.6 PINV.7 PINV.8 87.63,51.12 | 87.63,51.12 PINV.9 PINV.10 PINV.11 80.96,51.12 | 80.96,51.12 PINV.12 | R8.2 JMEM.3 | L2.2 v2.22,55.56 | 99.38,51.12 PINV.4 | R7.2 80.96,51.12 | R3.2 97.47,51.12 | R5.2 87.63,51.12 | C12.+ C11.2 v104.77,20 | DD2.8 86.99,22.54 v87.95,23.18
  Bottom 0.305: DISPLAY.VCC 97.83,41.87 99.06,40.01 99.06,37.47 98.42,36.83
  Bottom 0.406: 102.23,22.86 100.33,22.86 98.42,24.76 98.42,36.83 | v87.95,23.18 86.68,23.81 80.33,23.81 79.06,25.08 79.06,27.3 80.64,28.89
  Bottom 0.61: v87.95,23.18 87.95,22.54 92.08,18.41 JMEM.3 92.08,16.51 93.98,14.61 R9.2 100.65,14.61 102.87,16.83 KB3.1 103.19,18.73 103.19,20 | PINV.12 78.1,51.12 77.15,50.16 77.15,45.09 78.1,43.82 81.91,43.82 82.87,42.86 82.87,40.01 84.14,38.73 ISP.2 82.55,37.15 80.64,35.24 80.64,28.89 | 102.23,22.86 103.19,21.91 103.19,20 | v104.77,20 103.19,20